# EAGLE board 6309 CPU Card v2 (EAGLE 4.16)
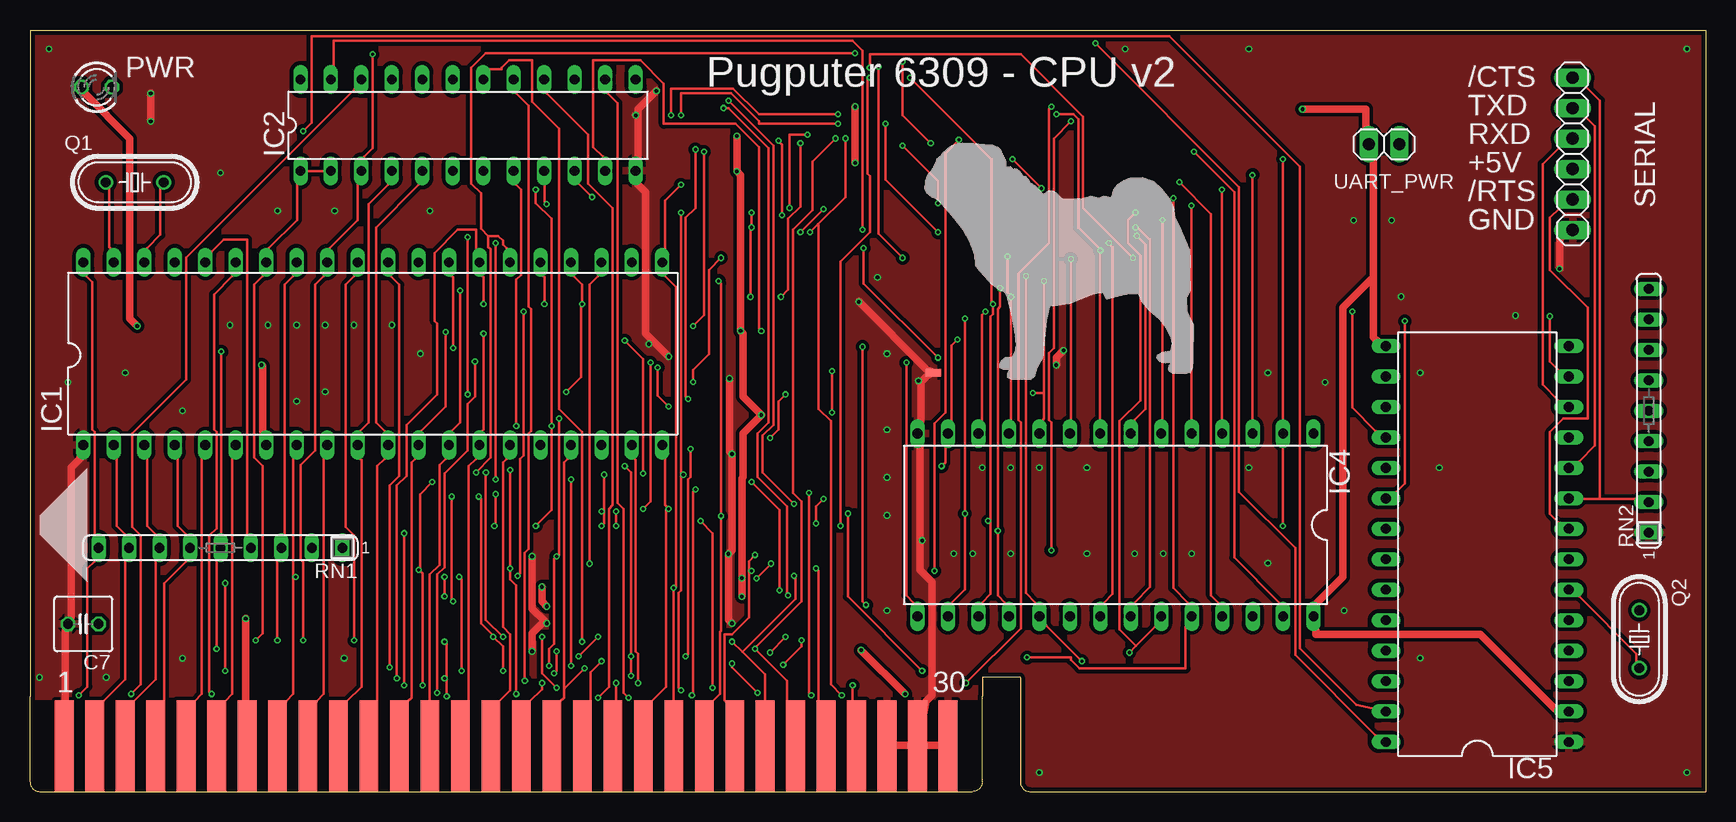
[diagram p0: board, top side]
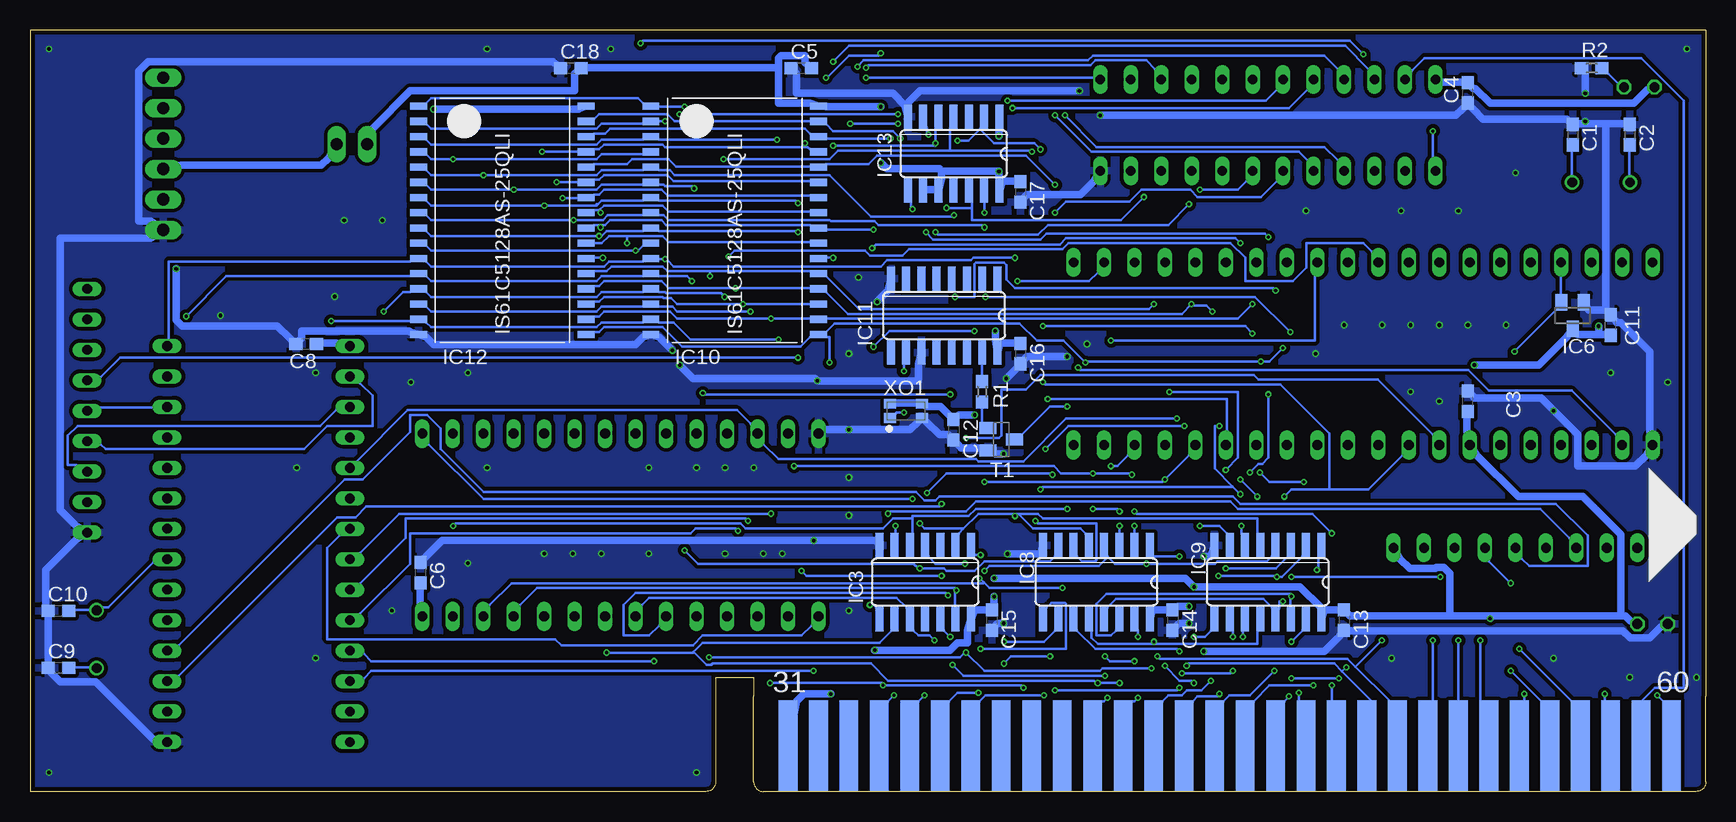
[diagram p1: board, bottom side, seen from below]

Size 139.7 x 63.5 mm. Coordinates in mm from the lower left corner, seen from the top.
Outline: 0,7.94 0,63.5 139.7,63.5 139.7,0 83.34,0 arc-90 82.55,0.79 82.55,9.53 79.38,9.53 79.38,7.94
Copper layers (1*16): Top 0.0356mm / dielectric 1.6mm / Bottom 0.0356mm
Design rules "oshpark-2layer": minimum track width 6mil, minimum drill 10mil, track to track 6mil, track to pad 6mil, pad to pad 6mil, via to via 6mil, smd to smd 6mil, copper to edge 15mil, drill to drill 6mil, minimum pad ring 5mil, minimum via ring 5mil, stop-mask expansion 2.5mil, vias tented up to drill 0mil, thermal gap 10mil
Net classes: 0 default: width 0.203 mm, drill 0.203 mm, clearance 0.254 mm; 1 supply: width 0.61 mm, drill 0.203 mm, clearance 0.305 mm

## Footprints (pad centres in the part's own frame; a part is rotated, then mirrored left to right if it is on the bottom)
C0603 = smd 1.1 x 1: 1 -0.85,0; 2 0.85,0
C025-050X050 = drill 0.813 octagon: 1 -1.27,0; 2 1.27,0
DIL40 = drill 0.813 long: 1 -24.13,-7.62; 2 -21.59,-7.62; 3 -19.05,-7.62; 4 -16.51,-7.62; 5 -13.97,-7.62; 6 -11.43,-7.62; 7 -8.89,-7.62; 8 -6.35,-7.62; 9 -3.81,-7.62; 10 -1.27,-7.62; 11 1.27,-7.62; 12 3.81,-7.62; 13 6.35,-7.62; 14 8.89,-7.62; 15 11.43,-7.62; 16 13.97,-7.62; 17 16.51,-7.62; 18 19.05,-7.62; 19 21.59,-7.62; 20 24.13,-7.62; 21 24.13,7.62; 22 21.59,7.62; 23 19.05,7.62; 24 16.51,7.62; 25 13.97,7.62; 26 11.43,7.62; 27 8.89,7.62; 28 6.35,7.62; 29 3.81,7.62; 30 1.27,7.62; 31 -1.27,7.62; 32 -3.81,7.62; 33 -6.35,7.62; 34 -8.89,7.62; 35 -11.43,7.62; 36 -13.97,7.62; 37 -16.51,7.62; 38 -19.05,7.62; 39 -21.59,7.62; 40 -24.13,7.62
DIL24-3 = drill 0.813 long: 1 -13.97,-3.81; 2 -11.43,-3.81; 3 -8.89,-3.81; 4 -6.35,-3.81; 5 -3.81,-3.81; 6 -1.27,-3.81; 7 1.27,-3.81; 8 3.81,-3.81; 9 6.35,-3.81; 10 8.89,-3.81; 11 11.43,-3.81; 12 13.97,-3.81; 13 13.97,3.81; 14 11.43,3.81; 15 8.89,3.81; 16 6.35,3.81; 17 3.81,3.81; 18 1.27,3.81; 19 -1.27,3.81; 20 -3.81,3.81; 21 -6.35,3.81; 22 -8.89,3.81; 23 -11.43,3.81; 24 -13.97,3.81
SO14 = smd 0.66 x 2.032: 1 -3.81,-3.073; 2 -2.54,-3.073; 3 -1.27,-3.073; 4 0,-3.073; 5 1.27,-3.073; 6 2.54,-3.073; 7 3.81,-3.073; 8 3.81,3.073; 9 2.54,3.073; 10 1.27,3.073; 11 0,3.073; 12 -1.27,3.073; 13 -2.54,3.073; 14 -3.81,3.073
DIL28-6 = drill 0.813 long: 1 -16.51,-7.62; 2 -13.97,-7.62; 3 -11.43,-7.62; 4 -8.89,-7.62; 5 -6.35,-7.62; 6 -3.81,-7.62; 7 -1.27,-7.62; 8 1.27,-7.62; 9 3.81,-7.62; 10 6.35,-7.62; 11 8.89,-7.62; 12 11.43,-7.62; 13 13.97,-7.62; 14 16.51,-7.62; 15 16.51,7.62; 16 13.97,7.62; 17 11.43,7.62; 18 8.89,7.62; 19 6.35,7.62; 20 3.81,7.62; 21 1.27,7.62; 22 -1.27,7.62; 23 -3.81,7.62; 24 -6.35,7.62; 25 -8.89,7.62; 26 -11.43,7.62; 27 -13.97,7.62; 28 -16.51,7.62
SOT23 = smd 1 x 1.4: 1 -0.95,-1.1; 2 0.95,-1.1; 3 0,1.1
SO16 = smd 0.66 x 2.032: 1 -4.445,-3.073; 2 -3.175,-3.073; 3 -1.905,-3.073; 4 -0.635,-3.073; 5 0.635,-3.073; 6 1.905,-3.073; 7 3.175,-3.073; 8 4.445,-3.073; 9 4.445,3.073; 10 3.175,3.073; 11 1.905,3.073; 12 0.635,3.073; 13 -0.635,3.073; 14 -1.905,3.073; 15 -3.175,3.073; 16 -4.445,3.073
SOIC32_11.3MM_WID = smd 1.4 x 0.6: 1 -6.985,9.525; 2 -6.985,8.255; 3 -6.985,6.985; 4 -6.985,5.715; 5 -6.985,4.445; 6 -6.985,3.175; 7 -6.985,1.905; 8 -6.985,0.635; 9 -6.985,-0.635; 10 -6.985,-1.905; 11 -6.985,-3.175; 12 -6.985,-4.445; 13 -6.985,-5.715; 14 -6.985,-6.985; 15 -6.985,-8.255; 16 -6.985,-9.525; 17 6.985,-9.525; 18 6.985,-8.255; 19 6.985,-6.985; 20 6.985,-5.715; 21 6.985,-4.445; 22 6.985,-3.175; 23 6.985,-1.905; 24 6.985,-0.635; 25 6.985,0.635; 26 6.985,1.905; 27 6.985,3.175; 28 6.985,4.445; 29 6.985,5.715; 30 6.985,6.985; 31 6.985,8.255; 32 6.985,9.525
CARDEDGE_2.54_60POS = smd 1.556 x 7.62: 1 -36.83,3.81; 2 -34.29,3.81; 3 -31.75,3.81; 4 -29.21,3.81; 5 -26.67,3.81; 6 -24.13,3.81; 7 -21.59,3.81; 8 -19.05,3.81; 9 -16.51,3.81; 10 -13.97,3.81; 11 -11.43,3.81; 12 -8.89,3.81; 13 -6.35,3.81; 14 -3.81,3.81; 15 -1.27,3.81; 16 1.27,3.81; 17 3.81,3.81; 18 6.35,3.81; 19 8.89,3.81; 20 11.43,3.81; 21 13.97,3.81; 22 16.51,3.81; 23 19.05,3.81; 24 21.59,3.81; 25 24.13,3.81; 26 26.67,3.81; 27 29.21,3.81; 28 31.75,3.81; 29 34.29,3.81; 30 36.83,3.81 | smd 1.556 x 7.62 bottom: 31 36.83,3.81; 32 34.29,3.81; 33 31.75,3.81; 34 29.21,3.81; 35 26.67,3.81; 36 24.13,3.81; 37 21.59,3.81; 38 19.05,3.81; 39 16.51,3.81; 40 13.97,3.81; 41 11.43,3.81; 42 8.89,3.81; 43 6.35,3.81; 44 3.81,3.81; 45 1.27,3.81; 46 -1.27,3.81; 47 -3.81,3.81; 48 -6.35,3.81; 49 -8.89,3.81; 50 -11.43,3.81; 51 -13.97,3.81; 52 -16.51,3.81; 53 -19.05,3.81; 54 -21.59,3.81; 55 -24.13,3.81; 56 -26.67,3.81; 57 -29.21,3.81; 58 -31.75,3.81; 59 -34.29,3.81; 60 -36.83,3.81
LED3MM = drill 0.813 octagon: A -1.27,0; K 1.27,0
HC49/S = drill 0.813 round: 1 -2.413,0; 2 2.413,0
R0603 = smd 1.1 x 1: 1 -0.85,0; 2 0.85,0
SIL9 = drill 0.813 long: 1 -10.16,0; 2 -7.62,0; 3 -5.08,0; 4 -2.54,0; 5 0,0; 6 2.54,0; 7 5.08,0; 8 7.62,0; 9 10.16,0
1X06 = drill 1.016 long: 1 -6.35,0; 2 -3.81,0; 3 -1.27,0; 4 1.27,0; 5 3.81,0; 6 6.35,0
SOT23-BEC = smd 1 x 1.4: B -0.95,-1.1; C 0,1.1; E 0.95,-1.1
LARGE_PUG = smd 1.27 x 0.635: P$1 2.286,3.962
1X02 = drill 1.016 long: 1 -1.27,0; 2 1.27,0
32K_XO_OM-7604-C7 = smd 1 x 0.8: CKOUT -1.35,-0.6; GND 1.35,-0.6; OE 1.35,0.6; VDD -1.35,0.6

## Placement (x,y rotation side)
C1  22p  [C0603]  11.11,54.77 270 bottom
C2  22p  [C0603]  6.35,54.77 270 bottom
C3  0.1u  [C0603]  19.84,32.54 90 bottom
C4  0.1u  [C0603]  19.84,58.26 90 bottom
C5  0.1u  [C0603]  75.41,60.33 0 bottom
C6  0.1u  [C0603]  107.16,18.26 270 bottom
C7  220U  [C025-050X050]  4.45,13.97 180 top
C8  0.1u  [C0603]  116.68,37.31 180 bottom
C9  22p  [C0603]  137.32,10.32 0 bottom
C10  22p  [C0603]  137.32,15.08 0 bottom
C11  0.1u  [C0603]  7.94,38.89 90 bottom
C12  0.1u  [C0603]  62.71,30.16 270 bottom
C13  0.1u  [C0603]  30.16,14.29 270 bottom
C14  0.1u  [C0603]  44.45,14.29 270 bottom
C15  0.1u  [C0603]  59.53,14.29 270 bottom
C16  0.1u  [C0603]  57.15,36.51 270 bottom
C17  0.1u  [C0603]  57.15,50.01 270 bottom
C18  0.1u  [C0603]  94.61,60.33 0 bottom
IC1  HD63C09P  [DIL40]  28.57,36.51 0 top
IC2  PLD_ATF22V10B  [DIL24-3]  36.51,55.56 0 top
IC3  74ALS21D  [SO14]  65.09,17.46 180 bottom
IC4  EEP_32KX8_AT28C256  [DIL28-6]  90.49,22.23 180 top
IC5  UART_W65C51N  [DIL28-6]  120.65,20.64 90 top
IC6  POR_APX803L05-33SA-7  [SOT23]  11.11,39.69 180 bottom
IC8  74LS670D  [SO16]  50.8,17.46 180 bottom
IC9  74LS670D  [SO16]  36.51,17.46 180 bottom
IC10  IS61C5128AS  [SOIC32_11.3MM_WID]  80.96,47.62 0 bottom
IC11  74HC4040D  [SO16]  63.5,39.69 180 bottom
IC12  IS61C5128AS  [SOIC32_11.3MM_WID]  100.33,47.62 0 bottom
IC13  74ALS21D  [SO14]  62.71,53.18 180 bottom
J1  CARDEDGE_2.54_60POS  [CARDEDGE_2.54_60POS]  39.69,0 0 top
PWR  [LED3MM]  5.56,58.74 0 top
Q1  14.31818M  [HC49/S]  8.73,50.8 0 top
Q2  1.8432M  [HC49/S]  134.14,12.7 270 top
R1  1k  [R0603]  60.33,33.34 270 bottom
R2  680R  [R0603]  9.53,60.33 0 bottom
RN1  10K  [SIL9]  15.88,20.32 180 top
RN2  10K  [SIL9]  134.94,31.75 90 top
SERIAL  [1X06]  128.59,53.18 90 top
T1  MMBT2222A  [SOT23-BEC]  58.74,29.37 270 bottom
U$2  PUG  [LARGE_PUG]  73.03,30.96 0 top
UART_PWR  [1X02]  112.87,53.98 0 top
XO1  XODC_32KHZ_OM-7604-C7  [32K_XO_OM-7604-C7]  66.67,31.75 0 bottom

## Library data of the parts
C1-C18 R1 R2 = rcl
IC1 IC2 IC4-IC6 IC10-IC12 J1 U$2 XO1 = 07-Retrocomputing
IC3 IC8 IC9 IC13 = 74xx-us
PWR = led
Q1 Q2 = crystal
RN1 RN2 = resistor-sil
SERIAL UART_PWR = pinhead
T1 = transistor

## Nets
/BREQ: IC1.33 J1.53 RN1.3
/FIRQ: IC1.4 J1.4 RN1.6
/HALT: IC1.40 J1.60 RN1.9
/IO: IC2.17 J1.43
/IRQ: IC1.3 IC5.26 J1.3 RN1.7
/MR: IC8.11 IC9.11 RN2.6
/MRDY: IC1.36 J1.56 RN1.4
/MW: IC2.18 IC8.12 IC9.12
/NMI: IC1.2 J1.2 RN1.8 T1.C
/RAM0: IC2.21 IC10.22
/RAM1: IC2.15 IC12.22
/RD: IC2.23 IC4.22 IC10.24 IC12.24 J1.59
/RES: IC1.37 IC5.4 IC6.2 J1.57 RN1.5
/ROM: IC2.20 IC4.20
/UART: IC2.19 IC5.3
/WR: IC2.22 IC4.27 IC10.29 IC12.29 J1.58
/XMEM: IC2.16 J1.42
A0: IC1.8 IC4.10 IC5.13 IC8.14 IC9.14 IC10.12 IC12.12 J1.8
A1: IC1.9 IC4.9 IC5.14 IC8.13 IC9.13 IC10.11 IC12.11 J1.9
A2: IC1.10 IC2.4 IC4.8 IC10.10 IC12.10 J1.10
A3: IC1.11 IC2.5 IC4.7 IC10.9 IC12.9 J1.11
A4: IC1.12 IC4.6 IC10.8 IC12.8 IC13.13 J1.12
A5: IC1.13 IC4.5 IC10.7 IC12.7 IC13.5 J1.13
A6: IC1.14 IC4.4 IC10.6 IC12.6 IC13.4 J1.14
A7: IC1.15 IC4.3 IC10.5 IC12.5 IC13.2 J1.15
A8: IC1.16 IC3.13 IC4.25 IC10.27 IC12.27 J1.16
A9: IC1.17 IC3.12 IC4.24 IC10.26 IC12.26 J1.17
A10: IC1.18 IC3.10 IC4.21 IC10.23 IC12.23 J1.18
A11: IC1.19 IC3.9 IC4.23 IC10.25 IC12.25 J1.19
A12: IC1.20 IC3.5 IC4.2 IC10.4 IC12.4 J1.20
A13: IC1.21 IC3.4 IC4.26 IC10.28 IC12.28 J1.21
A14: IC1.22 IC3.2 IC4.1 IC8.5 IC9.5 J1.22
A15: IC1.23 IC3.1 IC8.4 IC9.4 J1.23
AUX0: IC2.14 J1.41
BA: IC1.6 J1.6
BS: IC1.5 J1.5
CTSB: IC5.9 RN2.2 SERIAL.6
D0: IC1.31 IC4.11 IC5.18 IC8.15 IC10.13 IC12.13 J1.51
D1: IC1.30 IC4.12 IC5.19 IC8.1 IC10.14 IC12.14 J1.50
D2: IC1.29 IC4.13 IC5.20 IC8.2 IC10.15 IC12.15 J1.49
D3: IC1.28 IC4.15 IC5.21 IC8.3 IC10.17 IC12.17 J1.48
D4: IC1.27 IC4.16 IC5.22 IC9.15 IC10.18 IC12.18 J1.47
D5: IC1.26 IC4.17 IC5.23 IC9.1 IC10.19 IC12.19 J1.46
D6: IC1.25 IC4.18 IC5.24 IC9.2 IC10.20 IC12.20 J1.45
D7: IC1.24 IC4.19 IC5.25 IC9.3 IC10.21 IC12.21 J1.44
DCDB: IC5.16 RN2.4
DSRB: IC5.17 RN2.3
DTRB: IC5.11
E14: IC8.10 IC10.3 IC12.3 J1.24
E15: IC8.9 IC10.31 IC12.31 J1.25
E16: IC8.7 IC10.2 IC12.2 J1.26
E17: IC8.6 IC10.1 IC12.1 J1.27
E18: IC9.10 IC10.30 IC12.30 J1.34
E19: IC2.6 IC9.9 J1.35
E20: IC2.7 IC9.7 J1.36
E21: IC2.8 IC9.6 J1.37
ECLK: IC1.34 IC2.1 IC2.2 IC5.27 J1.54
GND [supply]: C1.1 C2.1 C3.2 C4.1 C5.1 C6.1 C7.2 C8.2 C9.1 C10.1 C11.2 C12.2 C13.2 C14.2 C15.2 C16.2 C17.2 C18.1 IC1.1 IC2.12 IC3.7 IC4.14 IC5.1 IC6.1 IC8.8 IC9.8 IC10.16 IC11.8 IC11.11 IC12.16 IC13.7 J1.1 J1.28 J1.29 J1.30 R2.1 RN2.1 SERIAL.1 T1.E U$2.P$1 XO1.GND
HN1: IC2.9 IC13.8
HN2: IC2.11 IC3.8
HN3: IC2.13 IC3.6
N$1: R1.2 T1.B
N$2: PWR.K R2.2
N$3: IC11.15 R1.1
N$4 [supply]: SERIAL.3 UART_PWR.2
N$5: IC11.10 XO1.CKOUT
N$20: C9.2 IC5.6 Q2.2
N$21: C10.2 IC5.7 Q2.1
QCLK: IC1.35 J1.55
R//W: IC1.32 IC2.3 IC5.28 J1.52
RTSB: IC5.8 SERIAL.2
RXC: IC5.5
RXD: IC5.12 RN2.5 SERIAL.4
SSF: IC2.10 IC13.6 IC13.12
TXD: IC5.10 SERIAL.5
VCC [supply]: C3.1 C4.2 C5.2 C6.2 C7.1 C8.1 C11.1 C12.1 C13.1 C14.1 C15.1 C16.1 C17.1 C18.2 IC1.7 IC2.24 IC3.14 IC4.28 IC5.2 IC5.15 IC6.3 IC8.16 IC9.16 IC10.32 IC11.16 IC12.32 IC13.1 IC13.9 IC13.10 IC13.14 J1.7 J1.31 PWR.A RN1.1 UART_PWR.1 XO1.OE XO1.VDD
X1: C2.2 IC1.39 Q1.1
X2: C1.2 IC1.38 Q1.2

## Tracks (layer width: path | path; a pad name or v marks a point on that pad's centre or on a via)
/BREQ  (via drill 0.25)
  Top 0.203: IC1.33 21.95,42.98 21.23,42.27 21.23,21.44 RN1.3 20.62,19.2 v20.62,12.6
  Bottom 0.203: v20.62,12.6 20.62,7.52 J1.53
/FIRQ
  Top 0.203: IC1.4 12.29,27.74 12.29,22.15 13.01,21.44 RN1.6 13.01,19.2 11.18,17.37 11.18,7.52 J1.4
/HALT  (via drill 0.25)
  Top 0.203: IC1.40 4.67,42.98 5.18,42.47 5.18,30.18 5.38,29.97 5.38,21.44 RN1.9 5.38,19.2 4.78,18.59 4.78,8.74 v4.06,8.03
  Bottom 0.203: v4.06,8.03 3.56,7.52 J1.60
/IO  (via drill 0.25)
  Top 0.203: v41.25,9.25 41.25,19.91 41.55,20.22 41.55,29.87 41.76,30.07 41.76,40.23 41.55,40.44 41.55,57.2 40.54,58.22 IC2.17
  Bottom 0.203: v41.25,9.25 42.06,8.43 43.28,8.43 43.69,8.03 44.81,8.03 45.31,7.52 J1.43
/IRQ  (via drill 0.25)
  Top 0.203: IC1.3 9.75,27.74 9.75,22.15 10.46,21.44 RN1.7 10.46,19.2 10.46,9.35 8.64,7.52 J1.3 | v74.37,10.06 68.17,16.26 v68.17,23.16
  Bottom 0.203: v74.37,10.06 111.25,10.06 111.86,9.45 IC5.26 | v68.17,23.16 67.97,23.37 61.67,23.37 60.86,24.18 39.62,24.18 39.01,23.57 13.82,23.57 11.38,21.13 RN1.7
/MR  (via drill 0.25)
  Top 0.203: v39.42,10.06 39.42,12.09 v38.61,12.9 38.51,13.11 37.59,14.02 37.59,24.38 v37.39,24.59 | v43.69,9.86 43.89,10.06 v43.89,11.68 | v75.69,36.17 69.49,42.37 v69.49,45.31 | v38.81,26.01 v38.81,45.72
  Bottom 0.203: v38.61,12.9 38.61,13.41 IC9.11 | v39.42,10.06 39.62,9.86 v43.69,9.86 | v43.89,11.68 44.09,11.89 50.9,11.89 52.43,13.41 IC8.11 | v75.69,36.17 132.18,36.17 133.81,34.54 RN2.6 | v69.49,45.31 69.19,45.62 53.85,45.62 53.34,46.13 39.22,46.13 v38.81,45.72 | v37.39,24.59 v38.81,26.01
/MRDY  (via drill 0.25)
  Top 0.203: IC1.36 15.14,45.01 16.15,46.02 18.09,46.02 18.09,21.44 RN1.4 | v16.26,10.06 v16.26,17.37
  Bottom 0.203: v16.26,10.06 13.72,7.52 J1.56 | v16.26,17.37 18.09,19.2 RN1.4
/MW  (via drill 0.25)
  Top 0.203: v46.02,12.5 46.02,29.97 44.09,31.9 44.09,55.27 41.86,57.51 41.86,60.96 39.93,60.96 39.32,60.35 39.32,60.25 38.3,60.25 IC2.18
  Bottom 0.203: 46.02,12.29 50.7,12.29 51.21,12.8 51.21,13.41 IC8.12 | 46.02,12.29 37.39,12.29 37.39,13.41 IC9.12 | 46.02,12.29 v46.02,12.5
/NMI  (via drill 0.25)
  Top 0.203: v53.24,32.11 52.32,33.02 v52.32,35.36 | IC1.2 7.21,27.74 7.21,22.15 7.92,21.44 RN1.8 7.92,19.2 7.92,9.35 6.1,7.52 J1.2
  Bottom 0.203: v53.24,32.11 54.66,32.11 57,29.77 T1.C | v52.32,35.36 52.12,35.15 19.81,35.15 18.09,33.43 11.18,33.43 7.52,29.77 IC1.2
/RAM0  (via drill 0.25)
  Top 0.203: v72.75,44.5 70.71,46.53 v70.71,60.45
  Bottom 0.203: v72.75,44.5 73.36,44.5 IC10.22 | v70.71,60.45 70.21,60.96 51.51,60.96 51.1,61.37 31.8,61.37 30.68,60.25 IC2.21
/RAM1  (via drill 0.25)
  Top 0.203: v91.95,44.5 87.78,48.67 87.78,56.29 82.6,61.47 70,61.47 v70,60.35
  Bottom 0.203: v91.95,44.5 92.66,44.5 IC12.22 | v70,60.35 69.8,60.55 51.31,60.55 50.9,60.96 46.63,60.96 45.92,60.25 IC2.15
/RD  (via drill 0.25)
  Top 0.203: v92.15,47.04 92.35,47.04 93.37,46.02 93.37,17.07 92.05,15.75 IC4.22 | v69.39,46.84 69.39,61.77 68.58,62.59 25.3,62.59 25.3,60.55 IC2.23
  Bottom 0.203: 92.15,47.24 92.66,47.24 IC12.24 | 92.15,47.24 91.75,47.24 91.34,47.65 87.07,47.65 86.67,47.24 74.68,47.24 IC10.24 73.36,46.84 v69.39,46.84 | 92.15,47.24 v92.15,47.04 | IC2.23 24.49,60.15 23.47,61.16 5.38,61.16 1.83,57.61 1.83,8.64 4.27,8.64 5.38,7.52 J1.59
/RES  (via drill 0.25)
  Top 0.203: v15.54,11.89 15.54,19.2 RN1.5 15.95,21.44 v15.95,36.68
  Bottom 0.203: IC1.37 12.09,42.98 12.09,41.45 IC6.2 12.5,40.13 v15.95,36.68 | v15.54,11.89 11.18,7.52 J1.57 | IC5.4 127.31,12.19 113.49,26.01 111.96,26.01 108,29.97 108,31.39 106.58,31.39 105.46,30.28 105.46,28.55 101.91,24.99 65.84,24.99 65.13,24.28 64.21,24.28 63.91,24.59 39.42,24.59 38.81,23.98 12.5,23.98 9.86,21.34 9.86,18.8 14.73,18.8 15.34,19.41 RN1.5
/ROM  (via drill 0.25)
  Top 0.203: v57.81,57 58.22,57 61.57,53.65 61.57,30.79 60.66,29.87 60.66,26.21 63.09,23.77 63.09,16.46 v63.2,16.36
  Bottom 0.203: v57.81,57 34.75,57 33.22,58.52 IC2.20 | v63.2,16.36 63.4,16.56 89.2,16.56 90.22,15.54 90.22,13.01 88.09,13.01 87.27,13.82 IC4.20
/UART  (via drill 0.25)
  Top 0.203: v58.22,57.61 61.98,53.85 61.98,30.58 61.06,29.67 61.06,26.62 v63.7,23.98
  Bottom 0.203: v58.22,57.61 36.68,57.61 35.76,58.52 IC2.19 | v63.7,23.98 63.91,23.77 111.66,23.77 112.57,22.86 114.1,22.86 127.31,9.65 IC5.3
/WR  (via drill 0.25)
  Top 0.203: v97.03,53.34 100.38,49.99 100.38,19.51 104.14,15.75 IC4.27 | v8.43,8.13 9.25,8.94 9.25,21.34 8.53,22.05 8.53,29.87 13.01,34.34 13.01,44.5 27.03,58.52 IC2.22 | v75.08,54.05 72.75,56.39 v72.75,60.86
  Bottom 0.203: 75.08,53.75 86.77,53.75 86.97,53.95 91.85,53.95 92.25,53.54 92.66,53.54 IC12.29 v97.03,53.34 | 75.08,53.75 74.88,53.75 74.68,53.54 IC10.29 | v8.43,8.13 8.43,7.52 J1.58 | v75.08,54.05 75.08,53.75 | v72.75,60.86 71.42,62.18 30.07,62.18 28.14,60.25 IC2.22
/XMEM  (via drill 0.25)
  Top 0.203: v47.35,7.82 48.26,8.74 48.26,23.57 48.56,23.88 48.56,48.67 46.53,50.7 46.53,54.76 43.08,58.22 IC2.16
  Bottom 0.203: v47.35,7.82 47.65,7.52 47.85,7.52 J1.42
A0  (via drill 0.25)
  Top 0.203: 84.53,33.22 v84.53,42.57 | 84.53,33.22 84.53,31.09 84.43,30.99 IC4.10 | v126.69,39.62 126.69,35.87 127.41,35.15 IC5.13 | 21.95,17.88 21.95,8.13 21.34,7.52 J1.8 | 21.95,17.88 21.95,27.74 IC1.8 | v34.54,17.88 v34.54,16.26 | 21.95,17.88 v22.15,17.88 | v83.62,33.22 84.53,33.22 | v62.99,33.12 62.38,32.51 62.38,30.18 v61.67,29.46
  Bottom 0.203: v84.53,42.57 84.94,42.98 87.27,42.98 IC10.12 88.59,42.98 92.05,42.98 92.46,42.57 106.27,42.57 106.68,42.98 IC12.12 108,42.98 123.34,42.98 v126.69,39.62 | 34.65,16.26 34.65,16.46 49.99,16.46 50.8,15.65 50.8,13.01 49.58,13.01 49.17,13.41 IC8.14 | 34.65,16.26 34.65,15.34 IC9.14 | v34.54,16.26 34.65,16.26 | v22.15,17.88 v34.54,17.88 | v83.62,33.22 83.52,33.12 v62.99,33.12 | v61.67,29.46 58.93,29.46 58.73,29.67 58.73,33.53 56.69,33.53 55.47,34.75 37.69,34.75 37.29,34.34 27.33,34.34 22.76,29.77 IC1.8
A1  (via drill 0.25)
  Top 0.203: v86.77,44.4 86.77,30.99 IC4.9 | IC1.9 24.49,27.74 24.49,8.13 23.88,7.52 J1.9 | v35.26,15.85 35.15,15.95 v35.15,24.59 | v57.61,44.5 56.59,43.48 56.59,36.47 55.27,35.15 v55.27,34.14
  Bottom 0.203: IC5.14 128.12,37.69 128.12,44.2 108,44.2 IC12.11 106.68,44.2 106.27,43.79 91.85,43.79 91.44,44.2 88.59,44.2 IC10.11 87.27,44.4 v86.77,44.4 86.56,44.3 86.06,43.79 68.78,43.79 68.28,44.3 61.27,44.3 61.06,44.5 v57.61,44.5 | IC8.13 49.89,15.34 49.17,16.05 36.88,16.05 36.17,15.34 IC9.13 35.56,15.34 35.56,15.85 v35.26,15.85 | v35.15,24.59 34.54,25.2 31.39,25.2 | 31.39,25.2 28.14,25.2 25.3,28.04 IC1.9 | v55.27,34.14 55.07,33.93 35.46,33.93 31.39,29.87 31.39,25.2
A2  (via drill 0.25)
  Top 0.203: IC4.8 89.2,30.99 v89.2,45.11 89.1,45.31 87.38,47.04 87.38,56.08 86.97,56.49 v85.55,56.49 | J1.10 26.42,7.52 27.64,8.74 27.64,27.64 27.53,27.74 IC1.10 27.53,30.07 28.25,30.79 28.25,48.97 29.87,50.6 IC2.4 | v67.36,56.49 60.76,56.49 58.62,58.62 53.44,58.62 v53.44,56.39
  Bottom 0.203: IC10.10 88.59,45.52 89,45.11 v89.2,45.11 106.27,45.11 106.68,45.52 IC12.10 | v67.36,56.49 v85.55,56.49 | v53.44,56.39 50.8,53.75 31.8,53.75 30.68,52.63 IC2.4
A3  (via drill 0.25)
  Top 0.203: v92.25,46.33 92.96,45.62 92.96,31.9 92.05,30.99 IC4.7 | J1.11 28.96,7.52 28.96,27.13 29.57,27.74 IC1.11 29.57,30.07 28.85,30.79 28.85,47.04 32.41,50.6 IC2.5 | v75.69,46.63 71.32,51 v71.32,55.68 | v67.36,55.68 60.76,55.68 60.76,55.88 58.42,58.22 54.25,58.22 v54.25,56.39
  Bottom 0.203: IC12.9 106.68,46.74 106.27,46.33 v92.25,46.33 92.05,46.33 91.64,46.74 88.59,46.74 IC10.9 87.27,46.74 75.79,46.74 v75.69,46.63 | v67.36,55.68 v71.32,55.68 | v54.25,56.39 51.21,53.34 33.93,53.34 33.22,52.63 IC2.5
A4  (via drill 0.25)
  Top 0.203: J1.12 31.5,7.52 31.8,7.82 31.8,27.43 32.11,27.74 IC1.12 32.61,30.07 34.65,32.11 v34.65,38.3 | v60.15,48.26 v60.15,47.04 60.05,46.84 v60.05,41.25 | v94.39,47.65 94.39,30.99 IC4.6
  Bottom 0.203: IC12.8 106.68,48.06 106.27,47.65 v94.39,47.65 91.95,47.65 91.54,48.06 88.59,48.06 IC10.8 87.27,48.06 86.87,48.06 86.46,47.65 73.05,47.65 72.95,47.55 69.29,47.55 68.99,47.24 60.35,47.24 v60.15,47.04 | v60.15,48.26 60.15,49.17 IC13.13 | v34.65,38.3 37.59,41.25 v60.05,41.25
A5  (via drill 0.25)
  Top 0.203: J1.13 33.33,7.52 33.33,18.09 34.14,18.9 34.14,27.23 34.65,27.74 IC1.13 35.15,30.07 35.87,30.79 v35.87,41.76 | v72.75,53.85 75.69,50.9 v75.69,49.07 | v96.83,48.87 96.83,30.99 IC4.5 | v62.59,41.25 63.2,41.86 63.2,47.75 64.21,48.77 v64.21,54.05
  Bottom 0.203: IC12.7 106.68,49.28 106.27,48.87 v96.83,48.87 92.46,48.87 92.46,48.97 92.35,48.97 92.05,49.28 88.59,49.28 IC10.7 87.27,49.28 75.89,49.28 v75.69,49.07 | v72.75,53.85 64.21,53.85 v64.21,54.05 64.21,55.27 IC13.5 | v35.87,41.76 36.07,41.96 57.61,41.96 58.32,42.67 58.32,43.89 58.52,44.09 60.86,44.09 60.96,43.99 60.96,41.25 v62.59,41.25
A6  (via drill 0.25)
  Top 0.203: J1.14 36.58,7.52 36.58,27.13 37.19,27.74 IC1.14 37.69,30.07 37.8,30.18 v37.8,38.2 | v81.89,52.73 v84.33,50.29 | v99.36,50.19 99.36,30.99 IC4.4 | v55.27,38.81 56.19,39.73 v56.19,53.34
  Bottom 0.203: IC12.6 106.68,50.6 106.27,50.19 v99.36,50.19 92.46,50.19 92.05,50.6 88.59,50.6 IC10.6 87.27,50.6 86.87,50.6 86.77,50.49 84.53,50.49 v84.33,50.29 | 62.99,53.44 62.99,55.27 IC13.4 | 62.99,53.44 72.34,53.44 73.05,52.73 v81.89,52.73 | v37.8,38.2 38.41,38.81 v55.27,38.81 | v56.19,53.34 56.29,53.44 62.99,53.44
A7  (via drill 0.25)
  Top 0.203: IC1.15 39.73,27.74 39.42,27.43 39.42,13.72 40.03,13.11 40.03,8.43 39.12,7.52 J1.15 | v62.38,54.25 62.69,53.95 v62.69,48.06 | v101.91,51.41 101.91,30.99 IC4.3 | v54.86,32.72 54.66,32.92 54.66,47.85 55.47,48.67 v55.47,53.54
  Bottom 0.203: IC12.5 106.68,51.82 106.27,51.41 v101.91,51.41 92.46,51.41 92.05,51.82 88.59,51.82 IC10.5 87.27,51.82 86.36,51.82 85.95,51.41 73.05,51.41 69.6,47.95 62.79,47.95 v62.69,48.06 | 60.5,55.22 61.47,54.25 v62.38,54.25 | 60.5,55.22 60.45,55.27 IC13.2 | v54.86,32.72 39.93,32.72 39.93,30.07 IC1.15 | v55.47,53.54 55.98,54.05 59.33,54.05 60.5,55.22
A8  (via drill 0.25)
  Top 0.203: v60.15,25.81 62.48,23.47 v62.48,16.76 | v42.67,9.04 42.67,8.53 41.66,7.52 J1.16 | v45.11,10.46 v45.11,26.01 | v95.81,50.8 98.45,48.16 98.45,16.36 99.06,15.75 IC4.25
  Bottom 0.203: IC10.27 74.68,50.9 86.06,50.9 86.56,51.41 91.85,51.41 92.25,51 92.66,51 IC12.27 v95.81,50.8 | 62.59,16.76 62.59,16.97 97.43,16.97 98.86,15.54 IC4.25 | 62.59,16.76 62.59,15.34 IC3.13 | v60.15,25.81 45.31,25.81 v45.11,26.01 43.08,28.04 IC1.16 | v62.48,16.76 62.59,16.76 | v42.67,9.04 42.88,9.25 43.89,9.25 v45.11,10.46
A9  (via drill 0.25)
  Top 0.203: v61.67,11.58 v62.99,12.9 | 44.55,8.59 44.5,8.53 44.5,7.82 44.2,7.52 J1.17 | 44.55,8.59 v46.23,10.26 | IC1.17 44.81,27.74 44.5,27.43 44.5,8.64 44.55,8.59 | v95.3,49.48 95.3,16.97 96.52,15.75 IC4.24 96.32,13.72 96.32,10.26 87.48,10.26 86.77,10.97 86.77,11.18 v83.11,11.18
  Bottom 0.203: v62.99,12.9 63.5,13.41 IC3.12 | v46.23,10.26 50.29,10.26 50.49,10.06 60.15,10.06 v61.67,11.58 61.87,11.48 62.18,11.18 v83.11,11.18 | IC10.26 74.68,49.68 86.56,49.68 87.07,50.19 91.85,50.19 92.25,49.78 92.66,49.78 IC12.26 93.98,49.48 v95.3,49.48
A10  (via drill 0.25)
  Top 0.203: v49.58,27.13 50.09,26.62 v50.09,11.28 v50.09,9.65 | v47.65,10.87 46.74,9.96 46.74,7.52 J1.18 | v89.92,45.72 90.22,45.41 90.22,16.46 89.51,15.75 IC4.21 | v62.79,10.57 64.31,12.09 v64.31,12.6
  Bottom 0.203: v49.58,27.13 49.07,27.13 48.16,28.04 IC1.18 | v50.09,11.28 49.68,10.87 v47.65,10.87 | 89.92,46.33 91.44,46.33 92.05,45.72 IC12.23 | 89.92,46.33 86.97,46.33 86.46,45.82 74.68,45.82 IC10.23 | IC4.21 88.7,15.54 88.09,16.15 67.46,16.15 66.65,15.34 IC3.10 66.04,13.41 65.63,13.01 64.72,13.01 v64.31,12.6 | v89.92,45.72 89.92,46.33 | v50.09,9.65 61.87,9.65 v62.79,10.57
A11  (via drill 0.25)
  Top 0.203: v50.7,9.04 50.7,11.48 50.49,11.68 50.49,27.64 50.39,27.74 IC1.19 | v48.87,9.04 48.87,7.52 J1.19 | 92.2,12.14 93.78,13.72 IC4.23 | v91.64,11.58 92.2,12.14 | v92.15,48.26 91.54,47.65 91.54,45.72 92.56,44.7 92.56,32.61 90.83,30.89 90.83,13.51 92.2,12.14
  Bottom 0.203: v48.87,9.04 v50.7,9.04 50.9,9.14 51,9.25 68.17,9.25 69.6,10.67 82.8,10.67 82.91,10.57 83.31,10.57 84.38,11.63 | 92.2,48.51 92.25,48.46 92.66,48.46 IC12.25 | 92.2,48.51 91.85,48.87 86.97,48.87 86.46,48.36 74.68,48.36 IC10.25 | 84.38,11.63 84.43,11.58 v91.64,11.58 | 84.38,11.63 83.62,12.39 68.89,12.39 67.87,13.41 IC3.9 | v92.15,48.26 92.15,48.46 92.2,48.51
A12  (via drill 0.25)
  Top 0.203: v104.44,52.73 104.44,30.99 IC4.2 104.44,28.65 v104.44,22.15 | IC1.20 52.93,27.74 52.93,23.88 v53.24,23.57 53.03,23.47 53.03,8.74 51.82,7.52 J1.20
  Bottom 0.203: IC10.4 88.59,53.14 92.05,53.14 92.46,52.73 v104.44,52.73 106.27,52.73 106.68,53.14 IC12.4 | 66.14,22.76 66.14,22.96 61.47,22.96 60.86,23.57 v53.24,23.57 | 66.14,22.76 66.14,21.54 IC3.5 | v104.44,22.15 104.24,22.35 80.47,22.35 80.06,21.95 68.58,21.95 67.77,22.76 66.14,22.76
A13  (via drill 0.25)
  Top 0.203: v60.55,17.78 v61.77,19 | J1.21 53.65,7.52 v53.65,16.97 53.85,17.07 53.85,42.06 52.93,42.98 IC1.21 52.93,45.31 52.93,49.28 v54.25,50.6
  Bottom 0.203: IC12.28 92.66,52.32 89.92,52.32 89.51,52.73 86.46,52.73 85.85,52.12 74.68,52.12 IC10.28 73.36,52.32 69.8,52.32 69.09,53.03 56.69,53.03 v54.25,50.6 | v61.77,19 64.21,19 64.82,19.61 IC3.4 | 60.2,17.42 59.74,16.97 v53.65,16.97 | 60.2,17.42 v60.55,17.78 | IC4.26 101.4,15.54 99.57,17.37 60.25,17.37 60.2,17.42
A14  (via drill 0.25)
  Top 0.203: v57.4,42.57 57.61,42.37 v57.61,22.96 57.61,13.41 57.51,13.31 57.51,8.13 56.9,7.52 J1.22 | v66.14,24.38 65.53,23.77 v65.53,22.35
  Bottom 0.203: v57.4,42.57 51.41,42.57 50.7,43.28 IC1.22 | 57.61,23.16 60.66,23.16 61.92,21.89 | 57.3,23.16 57.61,23.16 | 57.3,23.16 55.68,23.16 55.27,22.76 37.39,22.76 37.39,21.54 IC9.5 | 61.92,21.89 62.28,21.54 IC3.2 | 57.3,23.16 56.08,21.95 52.12,21.95 51.71,21.54 IC8.5 | v66.14,24.38 101.91,24.38 106.48,28.96 IC4.1 | v65.53,22.35 65.13,21.95 61.98,21.95 61.92,21.89 | 57.61,23.16 v57.61,22.96
A15  (via drill 0.25)
  Top 0.203: v60.45,19.71 59.94,19.2 59.94,18.39 | 59.94,18.39 59.94,14.53 58.52,13.11 57.91,13.11 57.91,7.62 58.01,7.52 J1.23 | v46.63,19 46.63,42.27 47.35,42.98 IC1.23 | v60.15,18.39 59.94,18.39
  Bottom 0.203: v60.45,19.71 60.96,19.71 IC3.1 | 49.84,19.56 49.89,19.61 IC8.4 | 49.84,19.56 49.28,19 v46.63,19 40.95,19 40.74,19.2 36.58,19.2 36.17,19.61 IC9.4 | v60.15,18.39 59.74,18.8 50.6,18.8 49.84,19.56
AUX0  (via drill 0.25)
  Top 0.203: v49.89,7.82 49.48,8.23 49.48,23.57 48.97,24.08 48.97,57.4 48.16,58.22 IC2.14
  Bottom 0.203: v49.89,7.82 50.19,7.52 50.39,7.52 J1.41
BA
  Top 0.203: IC1.6 16.87,27.74 16.87,8.13 16.26,7.52 J1.6
BS
  Top 0.203: IC1.5 14.33,27.74 14.33,8.13 13.72,7.52 J1.5
CTSB
  Top 0.203: 130.86,24.38 133.81,24.38 RN2.2 | 130.86,24.38 129.44,24.38 IC5.9 | 130.86,24.38 130.86,57.61 129.64,58.83 SERIAL.6
D0  (via drill 0.25)
  Top 0.203: IC4.11 81.79,30.99 v81.79,41.25 81.69,41.45 81.48,41.66 v81.48,44.6 | v110.24,40.03 110.24,32 112.17,30.07 IC5.18 | v45.72,11.28 v47.35,12.9 | v27.03,12.6 27.03,21.34 26.31,22.05 26.31,42.27 27.03,42.98 IC1.31
  Bottom 0.203: v81.79,41.25 82.09,41.55 86.67,41.55 86.77,41.66 87.27,41.66 IC10.13 88.59,41.66 92.05,41.66 92.46,41.25 106.27,41.25 106.68,41.66 IC12.13 108,41.66 108.61,41.66 v110.24,40.03 | v47.35,12.9 47.35,13.41 IC8.15 | v45.72,11.28 45.52,11.07 29.87,11.07 29.21,10.41 | 29.21,10.41 26.31,7.52 J1.51 | 29.21,10.41 v27.03,12.6 | v81.48,44.6 80.97,45.11 70.1,45.11 69.7,44.7 66.95,44.7 66.45,45.21 53.65,45.21 53.14,45.72 39.62,45.72 38.41,44.5 38.41,42.57 34.44,42.57 33.33,43.69 33.33,45.72 28.55,45.72 27.84,45.01 IC1.31
D1  (via drill 0.25)
  Top 0.203: v79.65,40.03 79.35,39.73 79.35,30.99 IC4.12 | v43.28,10.46 43.28,11.89 43.69,12.29 43.69,19.41 v43.89,19.61 44.09,19.71 v44.09,31.09 | v29.97,10.36 29.97,25.5 30.79,26.31 30.79,42.27 30.07,42.98 IC1.30
  Bottom 0.203: IC12.14 106.68,40.44 106.27,40.03 92.46,40.03 92.05,40.44 88.59,40.44 IC10.14 87.27,40.44 86.16,40.44 85.75,40.03 v79.65,40.03 | IC5.19 112.47,27.53 108.2,31.8 80.77,31.8 79.65,30.68 IC4.12 78.54,28.96 77.32,27.74 60.86,27.74 60.66,27.53 56.9,27.53 53.34,31.09 v44.09,31.09 | v43.89,19.61 46.13,19.61 IC8.1 | v43.28,10.46 43.08,10.67 30.99,10.67 30.33,10.01 | 30.33,10.01 27.84,7.52 J1.50 | 30.33,10.01 v29.97,10.36
D2  (via drill 0.25)
  Top 0.203: v114.61,39.22 114.61,25.7 113.89,24.99 IC5.20 | v47.65,22.15 47.85,22.35 47.85,23.37 | 47.85,23.37 v47.85,26.42 | v76,27.13 76.3,27.43 76.3,28.65 IC4.13 76.81,30.99 76.81,37.19 v77.32,37.69 | v49.58,37.59 51.1,36.07 v51.1,26.52 | v31.19,8.84 v31.19,21.54 | v47.65,23.37 47.85,23.37
  Bottom 0.203: v114.61,39.22 108,39.22 IC12.15 106.68,39.12 106.27,38.71 92.46,38.71 92.05,39.12 88.59,39.12 IC10.15 87.27,39.12 86.06,39.12 84.63,37.69 v77.32,37.69 | v47.65,22.15 47.65,21.54 IC8.2 | v47.85,26.42 47.95,26.52 v51.1,26.52 53.75,26.52 54.36,27.13 v76,27.13 | v49.58,37.59 32.61,37.59 32.61,42.98 IC1.29 | v31.19,8.84 31.19,7.52 J1.49 | v31.19,21.54 32.82,23.16 47.45,23.16 v47.65,23.37
D3  (via drill 0.25)
  Top 0.203: v48.87,23.37 v48.87,22.15 | v51.1,23.57 51.71,24.18 v51.71,35.76 | v35.26,36.98 35.26,42.88 35.15,42.98 IC1.28 | v73.05,35.76 73.05,16.36 73.66,15.75 IC4.15 | v33.93,8.23 33.93,18.09 34.54,18.69 34.54,26.52 36.47,28.45 36.47,32.31 37.08,32.92 v37.08,35.87
  Bottom 0.203: IC10.17 74.68,37.9 75.49,37.08 85.34,37.08 86.97,38.71 91.85,38.71 92.25,38.3 92.66,38.3 IC12.17 | v48.87,22.15 48.87,21.54 IC8.3 | v48.87,23.37 49.07,23.57 v51.1,23.57 | IC10.17 73.36,38.3 72.64,39.01 57.2,39.01 55.78,37.59 53.54,37.59 v51.71,35.76 51.51,35.87 v37.08,35.87 36.37,35.87 v35.26,36.98 | v73.05,35.76 73.05,37.9 73.36,37.9 IC10.17 | IC5.21 113.89,21.34 114.91,20.32 114.91,12.7 95.91,12.7 95.4,12.19 84.43,12.19 83.62,13.01 75.39,13.01 74.57,13.82 IC4.15 | v33.93,8.23 33.93,7.52 J1.48
D4  (via drill 0.25)
  Top 0.203: v34.54,12.5 34.75,12.29 34.75,9.45 | v34.75,7.92 34.75,9.45 | v37.8,40.64 37.8,42.88 37.69,42.98 IC1.27 37.19,45.31 37.19,46.84 35.66,46.84 33.73,44.91 33.73,39.22 33.93,39.01 33.93,33.12 31.39,30.58 31.39,26.31 30.58,25.5 v30.58,9.45 | v77.93,39.42 v77.93,23.16 77.93,16.87 76.81,15.75 IC4.16 | 34.75,9.45 v34.54,9.45
  Bottom 0.203: v34.54,12.5 33.63,13.41 IC9.15 | v34.75,7.92 35.15,7.52 J1.47 | IC12.18 92.66,39.62 92.25,39.62 91.85,40.03 86.36,40.03 85.75,39.42 v77.93,39.42 74.68,39.42 IC10.18 73.36,39.42 39.01,39.42 v37.8,40.64 | v77.93,23.16 108.92,23.16 112.17,19.91 IC5.22 | v34.54,9.45 v30.58,9.45
D5  (via drill 0.25)
  Top 0.203: v32.72,8.84 32.72,18.19 v32.41,18.49 32.51,18.69 32.51,24.79 v33.53,25.81 | 38.2,46.33 39.01,46.33 39.42,45.92 39.42,45.62 39.73,45.31 IC1.26 | 38.2,46.33 38.2,45.41 38.41,45.21 38.41,27.84 v37.19,26.62 | 80.06,22.55 80.06,39.62 80.26,39.83 v80.26,40.64 80.16,40.84 80.16,52.73 v73.36,59.54 | 80.06,22.55 80.06,16.46 79.35,15.75 IC4.17 | 80.06,22.55 v79.86,22.55 | 38.2,46.33 37.59,46.94 37.59,49.89 36.78,50.7 36.78,60.35 38,61.57 v68.78,61.57
  Bottom 0.203: v32.41,18.49 32.31,18.49 32.31,19.61 IC9.1 | v32.72,8.84 36.37,8.84 37.69,7.52 J1.46 | v37.19,26.62 36.37,25.81 v33.53,25.81 | IC10.19 v80.26,40.64 85.75,40.64 86.26,41.15 86.87,41.15 86.97,41.25 91.85,41.25 92.25,40.84 92.66,40.84 IC12.19 | v79.86,22.55 80.06,22.76 108.41,22.76 108.41,21.13 112.17,17.37 IC5.23 | v68.78,61.57 68.99,61.37 71.42,61.37 73.25,59.54 v73.36,59.54
D6  (via drill 0.25)
  Top 0.203: v35.76,17.88 35.97,17.68 v35.97,10.06 | v42.88,40.64 42.88,42.88 42.77,42.98 IC1.25 | v80.87,41.96 80.87,40.44 80.67,40.23 v80.67,21.74 80.67,16.36 81.28,15.75 IC4.18 | v40.64,17.98 40.84,18.19 40.84,27.74 41.15,28.04 v41.15,40.03
  Bottom 0.203: v35.97,10.06 38,8.03 39.73,8.03 40.23,7.52 J1.45 | IC9.2 33.63,19.61 35.36,17.88 v35.76,17.88 35.97,17.98 v40.64,17.98 | IC12.20 92.66,42.16 92.25,42.16 91.85,42.57 87.07,42.57 86.46,41.96 v80.87,41.96 74.68,41.96 IC10.20 73.36,41.66 71.53,39.83 43.69,39.83 v42.88,40.64 42.67,40.54 41.66,40.54 v41.15,40.03 | v80.67,21.74 80.87,21.95 84.23,21.95 84.63,21.54 108,21.54 108,19 112.17,14.83 IC5.24
D7  (via drill 0.25)
  Top 0.203: v40.54,8.13 40.54,17.17 40.03,17.68 v40.03,18.59 v40.03,26.82 | v87.68,10.87 84.73,13.82 IC4.19 83.82,15.75 83.01,16.56 v83.01,42.98 | IC1.24 45.31,42.98 46.02,42.27 v46.02,40.64 45.92,40.44 45.92,34.54 v44.7,33.33
  Bottom 0.203: v40.03,18.59 35.87,18.59 34.85,19.61 IC9.3 | v40.54,8.13 40.54,7.92 42.37,7.92 42.77,7.52 J1.44 | v87.68,10.87 111.25,10.87 111.86,11.48 IC5.25 | 83.01,43.38 86.56,43.38 86.97,43.79 91.24,43.79 91.64,43.38 92.66,43.38 IC12.21 | 83.01,43.38 74.68,43.38 IC10.21 73.36,42.98 70.61,40.23 46.43,40.23 v46.02,40.64 | 83.01,43.38 v83.01,42.98 | v40.03,26.82 39.01,27.84 39.01,33.33 v44.7,33.33
DCDB
  Bottom 0.203: IC5.16 112.17,34.04 111.15,33.02 111.15,30.48 114.91,30.48 116.84,28.55 133.4,28.55 133.81,28.96 RN2.4
DSRB
  Bottom 0.203: IC5.17 114.2,31.8 115.52,30.48 135.74,30.48 136.55,29.67 136.55,27.23 135.84,27.23 RN2.3
E14  (via drill 0.25)
  Top 0.203: 59.38,11.63 61.27,9.75 61.27,7.52 J1.24 | 59.38,11.63 v58.52,12.5 | v77.42,54.36 76.3,53.24 76.3,31.6 75.39,30.68 v75.39,18.39 | v63.7,17.98 63.8,17.88 63.8,16.05 59.38,11.63
  Bottom 0.203: IC12.3 106.68,54.36 106.27,53.95 92.46,53.95 92.05,54.36 88.59,54.36 IC10.3 87.27,54.36 v77.42,54.36 | v58.52,12.5 55.17,12.5 54.25,13.41 IC8.10 | v75.39,18.39 74.98,17.98 v63.7,17.98
E15  (via drill 0.25)
  Top 0.203: J1.25 63.09,7.52 63.09,9.25 v60.45,11.89 60.55,12.09 64.31,15.85 64.31,24.18 63.6,24.89 63.6,46.84 65.23,48.46 65.23,52.53 v67.16,54.46
  Bottom 0.203: IC12.31 92.66,56.08 92.25,56.49 86.56,56.49 85.95,55.88 IC10.31 73.36,55.68 72.75,55.07 67.77,55.07 v67.16,54.46 | v60.45,11.89 53.34,11.89 53.34,15.65 53.44,15.75 54.56,15.75 54.97,15.34 IC8.9
E16  (via drill 0.25)
  Top 0.203: v65.53,18.59 65.73,18.39 65.73,7.52 J1.26 | v86.77,55.88 85.34,54.46 85.34,36.98 84.94,36.58 84.94,30.99 85.14,30.79 v85.14,20.12
  Bottom 0.203: IC12.2 106.68,55.68 106.27,55.27 92.46,55.27 92.05,55.68 88.59,55.68 IC10.2 v86.77,55.88 | IC8.7 54.25,19.61 54.66,19.2 60.15,19.2 60.96,18.39 63.3,18.39 63.5,18.59 v65.53,18.59 65.73,18.69 66.04,19 84.02,19 v85.14,20.12
E17  (via drill 0.25)
  Top 0.203: v55.88,22.55 56.9,21.54 v56.9,8.64 | v68.58,8.84 68.58,7.52 J1.27 | v85.14,57.1 84.94,56.9 84.94,45.72 82.4,43.18 82.4,30.99 82.6,30.79 82.6,13.61 v78.03,9.04
  Bottom 0.203: IC12.1 106.68,57.4 106.27,57.81 89,57.81 88.59,57.4 IC10.1 87.27,57.1 v85.14,57.1 | v55.88,22.55 55.68,22.35 50.8,22.35 50.8,19.3 50.9,19.2 52.02,19.2 52.43,19.61 IC8.6 | v56.9,8.64 57.1,8.84 v68.58,8.84 68.68,9.04 v78.03,9.04
E18  (via drill 0.25)
  Top 0.203: v39.42,12.9 38,14.33 v38,26.62 | v36.47,33.12 v36.47,46.23 | 65.68,47.3 67.97,49.58 v67.97,54.46 | v65.02,46.63 65.68,47.3 | v67.67,8.03 66.75,8.94 66.75,30.89 65.73,31.9 65.73,47.24 65.68,47.3
  Bottom 0.203: IC12.30 92.66,54.86 91.75,54.86 91.34,55.27 75.08,55.27 74.68,54.86 IC10.30 73.36,54.46 v67.97,54.46 | v39.42,12.9 39.42,13.41 IC9.10 | v38,26.62 37.29,27.33 36.98,27.33 36.47,27.84 v36.47,33.12 | v36.47,46.23 36.78,46.53 54.97,46.53 55.47,46.02 64.41,46.02 v65.02,46.63 | v67.67,8.03 68.17,7.52 J1.34
E19  (via drill 0.25)
  Top 0.203: v42.67,12.9 42.67,9.86 v43.89,8.64 | v54.25,8.43 54.05,8.64 54.05,16.56 54.25,16.76 54.25,26.42 | 54.25,26.42 v54.25,48.26 | v65.13,8.03 64.92,8.23 v64.92,24.89 | 54.25,26.42 v54.46,26.42
  Bottom 0.203: v42.67,12.9 41.76,12.9 41.25,13.41 IC9.9 | v43.89,8.64 44.09,8.43 v54.25,8.43 | v54.25,48.26 53.34,49.17 48.06,49.17 47.04,50.19 42.98,50.19 42.37,49.58 37.08,49.58 35.76,50.9 IC2.6 | v65.13,8.03 65.63,7.52 J1.35 | v64.92,24.89 63.3,26.52 54.56,26.52 v54.46,26.42
E20  (via drill 0.25)
  Top 0.203: v42.16,22.15 43.48,23.47 v43.48,30.48 43.48,47.75 42.16,49.07 v42.16,50.19 | v60.66,8.23 58.52,10.36 v58.52,10.67 | v54.66,11.28 54.86,11.48 54.86,26.01 55.07,26.21 v55.07,28.55
  Bottom 0.203: v42.16,22.15 40.54,22.15 39.93,21.54 IC9.7 | v42.16,50.19 39.01,50.19 38.3,50.9 IC2.7 | v60.66,8.23 62.38,8.23 63.09,7.52 J1.36 | v58.52,10.67 57.91,11.28 v54.66,11.28 | v55.07,28.55 53.14,30.48 v43.48,30.48
E21  (via drill 0.25)
  Top 0.203: v38.71,22.15 38.81,22.25 v38.81,24.79 | v40.54,30.48 40.54,42.67 40.95,43.08 40.95,50.19 40.54,50.6 IC2.8 | v55.17,8.03 55.27,8.13 55.27,24.99 v55.47,25.2
  Bottom 0.203: v38.71,22.15 38.71,21.54 IC9.6 | 39.47,25.45 40.95,26.92 40.95,30.48 v40.54,30.48 | v38.81,24.79 39.47,25.45 | v55.17,8.03 60.05,8.03 60.55,7.52 J1.37 | v55.47,25.2 55.27,25.4 39.52,25.4 39.47,25.45
ECLK  (via drill 0.25)
  Top 0.203: IC2.2 24.49,51.71 23.06,51.71 IC2.1 22.25,50.6 22.25,47.65 19.91,45.31 IC1.34 19.41,42.98 18.69,42.27 18.69,27.84 19.41,27.13 19.41,13.21 v18.8,12.6 | v22.76,55.07 23.47,55.78 23.47,62.99 95,62.99 105.87,52.12 105.87,11.93 110.58,7.21 IC5.27
  Bottom 0.203: v22.76,55.07 22.76,52.93 IC2.1 | v18.8,12.6 18.8,7.52 J1.54
GND  (via drill 0.3)
  Top 0.61: v10.06,55.88 v10.06,58.22 | 42.88,14.22 41.86,15.24 v41.86,19.61 | 42.88,14.22 v43.08,14.02 | v41.86,11.68 41.86,13.21 42.88,14.22 | J1.1 2.95,7.52 2.95,13.41 C7.2 3.45,14.53 3.45,27.03 4.17,27.74 IC1.1 | v127.51,43.59 127.51,46.13 SERIAL.1 | v53.24,36.27 51.31,38.2 51.31,49.99 50.7,50.6 IC2.12 50.7,52.93 50.7,56.39 | v52.22,58.42 50.7,56.9 50.7,56.39 | J1.28 72.14,3.86 73.25,3.86 J1.29 | J1.30 75.79,3.86 74.68,3.86 J1.29 | v58.52,14.02 58.22,14.33 v58.22,19.81 58.52,20.12 v58.52,28.14 58.32,28.35 v58.32,34.44 | 74.27,34.14 74.78,34.65 U$2.P$1 74.78,35.15 v69.09,40.84 | 74.27,34.14 74.27,30.99 IC4.14 74.17,28.65 74.17,20.93 | 74.27,34.14 v74.07,34.24 | 74.17,20.93 74.17,18.49 75.18,17.48 75.18,8.03 74.68,7.52 J1.29 | 74.17,20.93 v74.37,20.93 | v86.16,36.78 85.55,36.17 v85.55,35.56 | v50.49,56.39 50.7,56.39
  Bottom 0.61: 10.06,55.68 10.67,55.68 C1.1 11.58,56.08 18.59,56.08 19.41,56.9 C4.1 20.32,56.9 20.83,56.39 v50.49,56.39 | 8.33,55.68 10.06,55.68 | 8.33,55.68 6.81,55.68 C2.1 | v10.06,58.22 10.06,59.84 R2.1 | 10.06,55.68 v10.06,55.88 | 8.43,40.13 9.75,40.13 IC6.1 | 8.43,40.13 C11.2 7.52,39.22 7.42,39.12 7.11,39.12 4.67,36.68 4.67,30.07 IC1.1 4.98,28.04 5.89,27.13 10.67,27.13 10.67,29.77 13.72,32.82 19.3,32.82 19.41,32.92 C3.2 | 8.33,55.68 8.33,40.34 8.43,40.13 | v43.08,14.02 43.89,14.02 43.99,13.92 C14.2 | v41.86,19.61 41.25,19.61 IC9.8 | C7.2 3.76,13.72 4.67,12.8 6.3,12.8 6.91,13.41 29.67,13.41 C13.2 30.58,12.9 31.8,11.68 v41.86,11.68 | IC5.1 129.44,4.37 134.21,9.14 137.16,9.14 137.87,9.86 C9.1 138.18,10.77 138.18,14.63 C10.1 138.38,15.54 138.38,18.49 135.84,21.03 RN2.1 135.84,22.15 137.16,23.47 137.16,46.13 129.64,46.13 SERIAL.1 129.64,47.55 130.66,47.55 130.66,60.05 129.84,60.86 96.11,60.86 96.01,60.76 C18.1 | v127.51,43.59 127.51,39.32 127,38.81 119.08,38.81 118.06,37.8 C8.2 117.04,37.8 117.04,38.41 108.1,38.41 108,38.3 IC12.16 106.68,37.9 106.07,37.29 89.2,37.29 88.59,37.9 IC10.16 87.27,37.9 v86.16,36.78 | 66.75,57.2 67.77,58.22 75.79,58.22 75.79,59.84 C5.1 | 66.75,57.2 IC13.7 | v53.24,36.27 56.59,36.27 56.69,36.17 C16.2 57.61,35.15 v58.32,34.44 | C17.2 56.69,49.68 56.59,49.78 52.12,49.78 51,50.9 IC2.12 | v52.22,58.42 65.53,58.42 66.75,57.2 | C6.1 106.68,19.61 105.36,20.93 v74.37,20.93 69.19,20.93 IC3.7 | v58.52,14.02 59.03,14.02 59.13,13.92 C15.2 | v58.22,19.81 55.47,19.81 IC8.8 | IC11.11 65.63,35.66 65.63,34.24 v74.07,34.24 74.27,34.44 84.43,34.44 v85.55,35.56
  Bottom 0.61: v69.09,40.84 68.17,41.76 IC11.8 | IC4.14 73.46,30.18 66.34,30.18 65.73,30.79 XO1.GND 64.92,30.79 63.91,29.77 63.2,29.77 C12.2 62.28,28.85 62.08,28.65 60.45,28.65 T1.E 59.23,28.14 v58.52,28.14
  other vias: 84.14,1.59 138.11,1.59 1.59,61.91 138.11,61.91 7.94,34.92 6.35,9.53 12.7,11.11 26.19,11.11 71.44,15.08 33.34,48.42 25.4,48.42 20.64,48.42 15.88,51.59 12.7,31.75 22.23,32.54 24.61,38.89 24.61,33.34 71.44,36.51 71.44,26.19 71.44,23.02 110.33,47.63 113.51,47.63 114.3,41.28 115.89,34.93 117.48,26.99 109.54,15.08 115.89,11.11 103.19,19.05 94.46,19.84 96.84,19.84 92.08,19.84 88.11,19.84 88.11,26.99 81.76,26.99 84.14,26.99 79.38,26.99 81.76,19.84 78.58,19.84 76.99,19.84 71.44,30.16 70.64,42.86 51.59,37.31 32.54,36.51 19.84,38.89 22.23,38.89 16.67,38.89 26.99,38.89 30.16,38.89 3.18,34.13 101.6,26.99 103.19,34.93 107.95,34.13 123.83,39.69 101.6,61.91 91.28,61.91 0.79,9.53
  pour Top: 0,63.5 139.7,63.5 139.7,0 82.55,0 82.55,7.94 0,7.94
  pour Bottom: 0,63.5 139.7,63.5 139.7,0 0,0
HN1  (via drill 0.25)
  Top 0.203: v64.21,46.63 v66.14,48.56 | v43.08,48.97 42.88,49.17 42.88,50.6 IC2.9
  Bottom 0.203: v66.14,48.56 66.24,48.56 66.24,49.17 IC13.8 | v64.21,46.63 64.01,46.43 55.68,46.43 54.86,47.24 44.81,47.24 v43.08,48.97
HN2  (via drill 0.25)
  Top 0.203: v69.7,15.54 69.39,15.85 v69.39,37.08 | v60.96,38.41 60.76,38.61 60.76,53.75 58.83,55.68 52.83,55.68 52.83,59.03 50.9,60.96 46.94,60.96 46.94,53.75 47.75,52.93 IC2.11
  Bottom 0.203: v69.7,15.54 69.39,15.54 69.19,15.34 IC3.8 | v69.39,37.08 68.07,38.41 v60.96,38.41
HN3  (via drill 0.25)
  Top 0.203: v67.56,22.15 67.56,44.2 70,46.63 70,51.31 69.8,51.51 69.8,59.33 v70,59.54
  Bottom 0.203: v67.56,22.15 67.56,21.54 IC3.6 | v70,59.54 51,59.54 IC2.13
N$1
  Bottom 0.203: R1.2 60.35,32 60.35,30.79 T1.B
N$2
  Bottom 0.203: R2.2 8.13,59.84 7.32,59.03 PWR.K
N$3
  Bottom 0.203: R1.1 60.35,34.65 60.35,35.66 IC11.15
N$4
  Bottom 0.61: UART_PWR.2 114.81,52.83 115.42,52.22 127.1,52.22 SERIAL.3
N$5  (via drill 0.25)
  Top 0.203: v66.85,31.6 v66.85,35.05
  Bottom 0.203: v66.85,31.6 67.46,31.6 67.56,31.5 XO1.CKOUT | v66.85,35.05 66.85,35.66 IC11.10
N$20
  Top 0.203: IC5.6 129.13,16.26 133.91,11.48 133.91,10.87 Q2.2
  Bottom 0.203: C9.2 135.94,10.36 134.72,10.36 Q2.2
N$21
  Bottom 0.203: C10.2 135.94,15.14 134.72,15.14 Q2.1 133.6,15.34 133.2,15.34 129.44,19.1 IC5.7
QCLK  (via drill 0.25)
  Top 0.203: v15.14,8.13 14.94,8.33 14.94,21.34 15.54,21.95 15.54,29.97 15.34,30.18 15.34,41.45 16.87,42.98 IC1.35
  Bottom 0.203: v15.14,8.13 15.14,7.52 J1.55
R//W  (via drill 0.25)
  Top 0.203: v88.8,62.38 100.79,50.39 100.79,24.99 105.46,20.32 105.46,11.38 112.17,4.67 IC5.28 | v28.55,61.47 28.55,53.65 27.84,52.93 IC2.3 27.33,50.6 27.33,47.65 24.99,45.31 IC1.32 24.49,42.98 23.77,42.27 23.77,28.45 22.55,27.23 22.55,19.3 22.76,19.1 v22.76,12.6
  Bottom 0.203: v88.8,62.38 88.59,62.59 29.67,62.59 v28.55,61.47 | v22.76,12.6 22.76,7.52 J1.52
RTSB
  Top 0.203: IC5.8 127.41,22.45 126.69,23.16 126.69,29.97 127.81,31.09 129.84,31.09 129.84,40.34 126.69,43.48 126.69,47.85 127.51,48.67 SERIAL.2
RXD
  Top 0.203: SERIAL.4 127.51,53.75 126.09,52.32 126.09,33.93 127.41,32.61 IC5.12
  Bottom 0.203: IC5.12 129.44,32 133.81,32 RN2.5
SSF  (via drill 0.25)
  Top 0.203: v46.84,49.58 45.72,50.7 IC2.10 | v64.82,54.76 63.3,54.76 v63.3,48.67
  Bottom 0.203: 61.16,48.67 61.16,47.65 48.77,47.65 v46.84,49.58 | 61.16,48.67 61.16,49.17 IC13.12 | v64.82,54.76 64.92,54.76 64.92,55.27 IC13.6 | 61.16,48.67 v63.3,48.67
TXD
  Top 0.203: IC5.10 129.13,27.53 130.45,28.85 130.45,55.47 129.64,56.29 SERIAL.5
VCC  (via drill 0.3)
  Top 0.61: IC5.2 127.1,6.91 120.9,13.11 107.19,13.11 107.19,13.41 IC4.28 107.29,15.75 109.42,17.88 109.42,40.34 111.76,42.67 111.96,42.67 | v106.07,56.9 111.35,56.9 111.35,55.47 UART_PWR.1 111.96,52.53 111.96,42.67 | 111.96,42.67 111.96,37.9 112.17,37.69 IC5.15 | v58.93,54.66 v58.93,51.71 59.23,51.41 v59.23,38.41 59.44,38.2 59.44,32.92 v60.96,31.39 59.44,29.87 59.44,26.21 59.33,26.11 v59.33,17.78 v59.33,16.26 | v69.29,11.79 v72.95,8.13 | v19.3,35.56 19.41,35.46 19.41,30.07 IC1.7 | v8.94,38.81 8.33,39.42 8.33,54.46 4.57,58.22 PWR.A | v43.08,15.44 42.67,15.85 v42.67,17.07 | v17.98,14.43 17.98,7.52 J1.7 | v68.78,52.43 v68.78,57.1
  Bottom 0.61: C6.2 107.19,16.87 107.19,15.75 IC4.28 | 77.32,60.35 77.32,57.4 74.68,57.4 IC10.32 73.36,57.1 v68.78,57.1 | 77.32,60.35 77.32,61.16 77.11,61.37 75.08,61.37 75.08,60.76 C5.2 | 77.32,60.35 93.27,60.35 C18.2 94.28,59.84 94.28,58.42 108,58.42 111.15,55.27 UART_PWR.1 | C8.1 115.32,37.39 114.2,37.39 IC5.15 | v106.07,56.9 93.98,56.9 IC12.32 | XO1.VDD 67.56,32.41 65.73,32.41 XO1.OE 64.92,32.11 63.8,32.11 63.2,31.5 C12.1 62.28,31.39 v60.96,31.39 | IC13.9 64.92,50.19 64.21,50.19 IC13.10 63.7,51.1 63.7,51.71 | C16.1 57.61,37.39 58.83,37.39 IC11.16 59.23,37.59 v59.23,38.41 | C17.1 57.61,50.9 58.62,50.9 IC13.14 58.93,51.1 v58.93,51.71 63.7,51.71 | v58.93,54.66 58.93,55.27 IC13.1 | v69.29,11.79 62.99,11.79 62.38,12.39 61.57,12.39 61.57,13.41 IC3.14 60.96,15.14 59.94,15.14 C15.1 59.33,15.65 v59.33,16.26 | v72.95,8.13 75.18,8.13 75.79,7.52 J1.31 | IC2.24 21.95,59.13 20.32,59.13 C4.2 19.41,58.62 19.2,58.62 17.98,57.4 5.99,57.4 4.88,58.52 PWR.A | 8.94,38.1 10.67,38.1 IC6.3 11.58,37.9 13.92,35.56 v19.3,35.56 | 8.94,38.1 8.43,38.1 C11.1 | C3.1 19.91,31.19 19.91,30.07 IC1.7 19.1,28.04 15.65,24.59 10.26,24.59 7.11,21.44 7.11,14.63 | 8.94,38.1 v8.94,38.81 | IC8.16 46.13,15.14 44.91,15.14 C14.1 43.99,15.44 v43.08,15.44 | 21.34,14.63 29.67,14.63 C13.1 30.58,15.14 31.8,15.14 IC9.16 32.11,15.34 33.83,17.07 v42.67,17.07 43.38,17.78 v59.33,17.78 | 17.98,14.63 21.34,14.63 | 7.11,14.63 17.98,14.63 | 7.11,14.63 6.71,14.63 6.3,14.22 C7.1 | RN1.1 25.5,19.41 24.69,18.59 22.55,18.59 22.45,18.69 21.84,18.69 21.34,18.19 21.34,14.63 | 17.98,14.63 v17.98,14.43 | v68.78,52.43 68.28,51.92 63.91,51.92 63.7,51.71
X1
  Top 0.203: IC1.39 6.71,45.31 6.6,45.41 6.6,50.29 Q1.1
  Bottom 0.203: C2.2 6.4,53.44 6.4,51.31 Q1.1
X2
  Top 0.203: IC1.38 9.75,45.31 10.87,46.43 10.87,50.29 Q1.2
  Bottom 0.203: C1.2 11.18,53.44 11.18,51.31 Q1.2

## Text on the board
tPlace: Pugputer 6309 - CPU v2
tNames: /CTS | TXD | RXD | +5V | /RTS | GND